# Altium PCB PCB.PcbDoc
Units mm, origin at the board's own origin, x right, y up, seen from the top; angles counter-clockwise.
Board outline 83.2 x 113.2 mm, 2 copper layers (Top Layer, Bottom Layer); 60 components, 35 nets, 209 pads, 0 vias.
Unrouted connection lines stored in the file: 143.
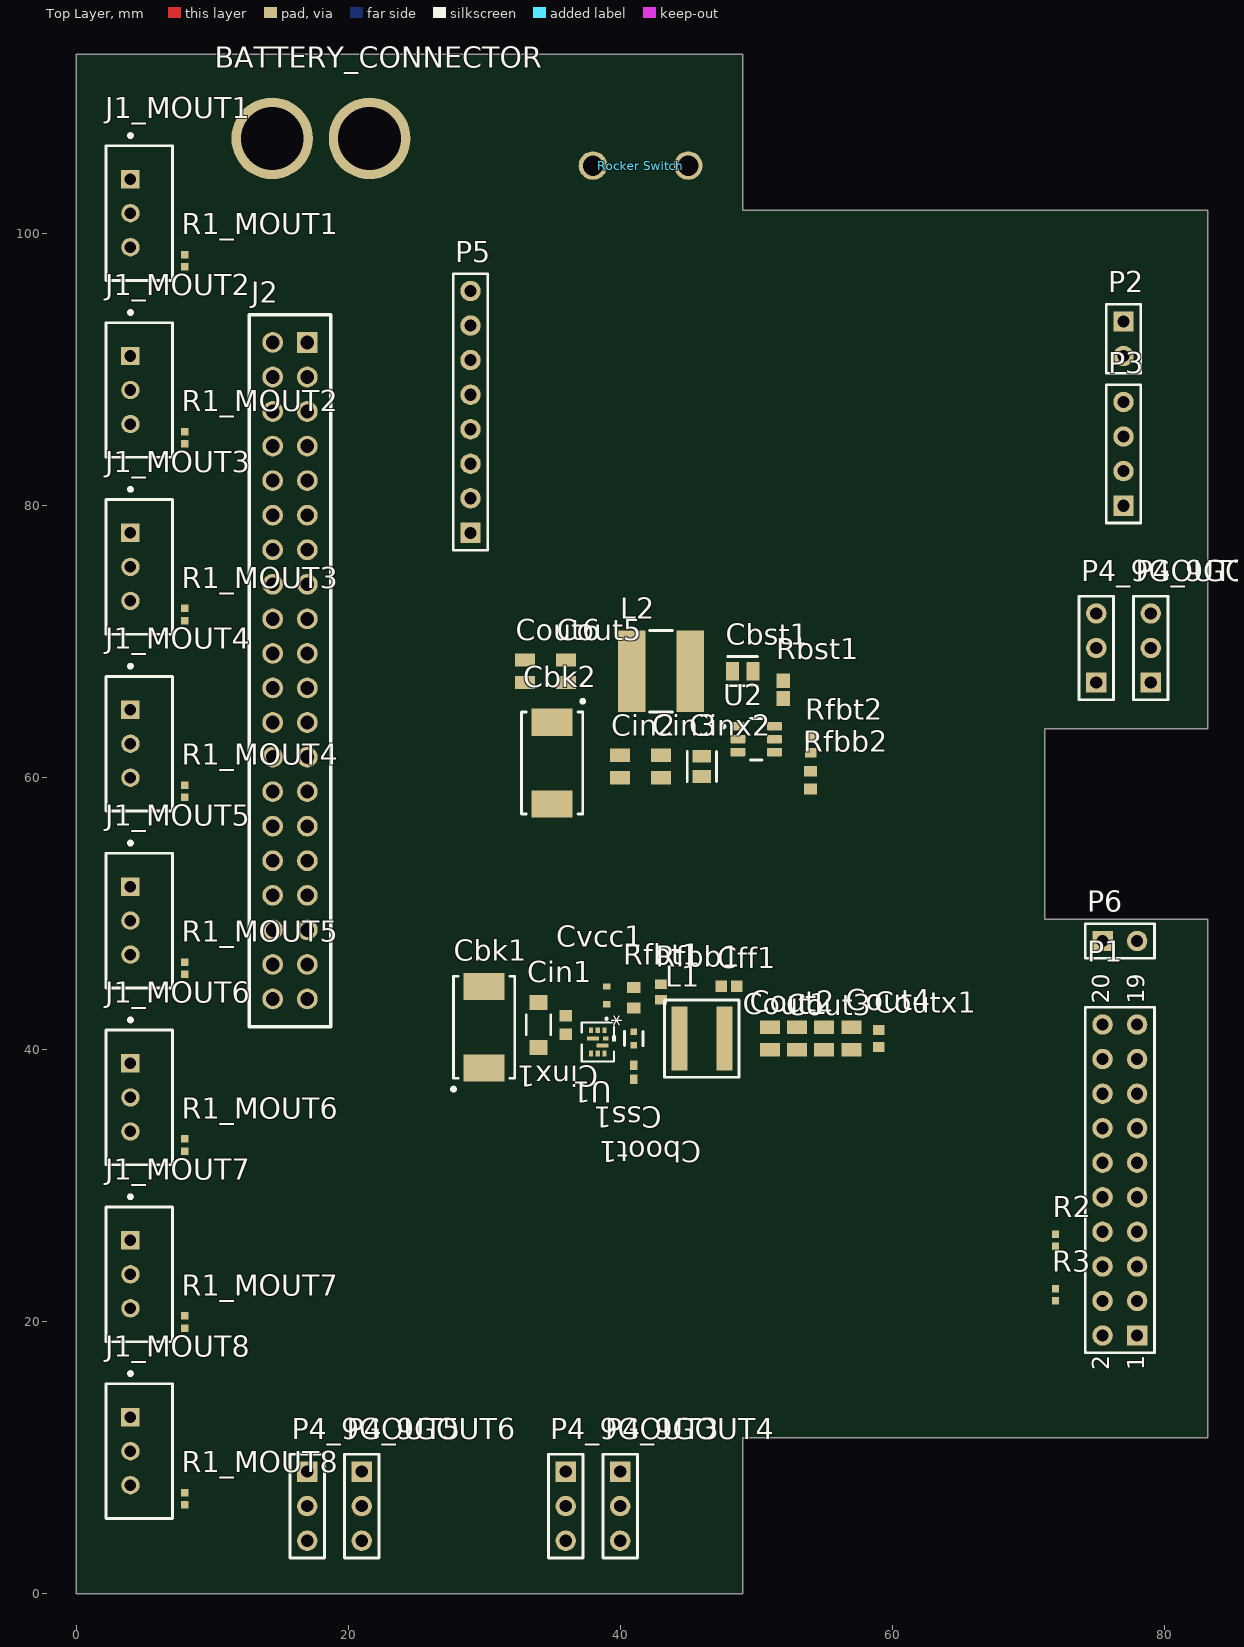
[diagram p0: Top Layer view]
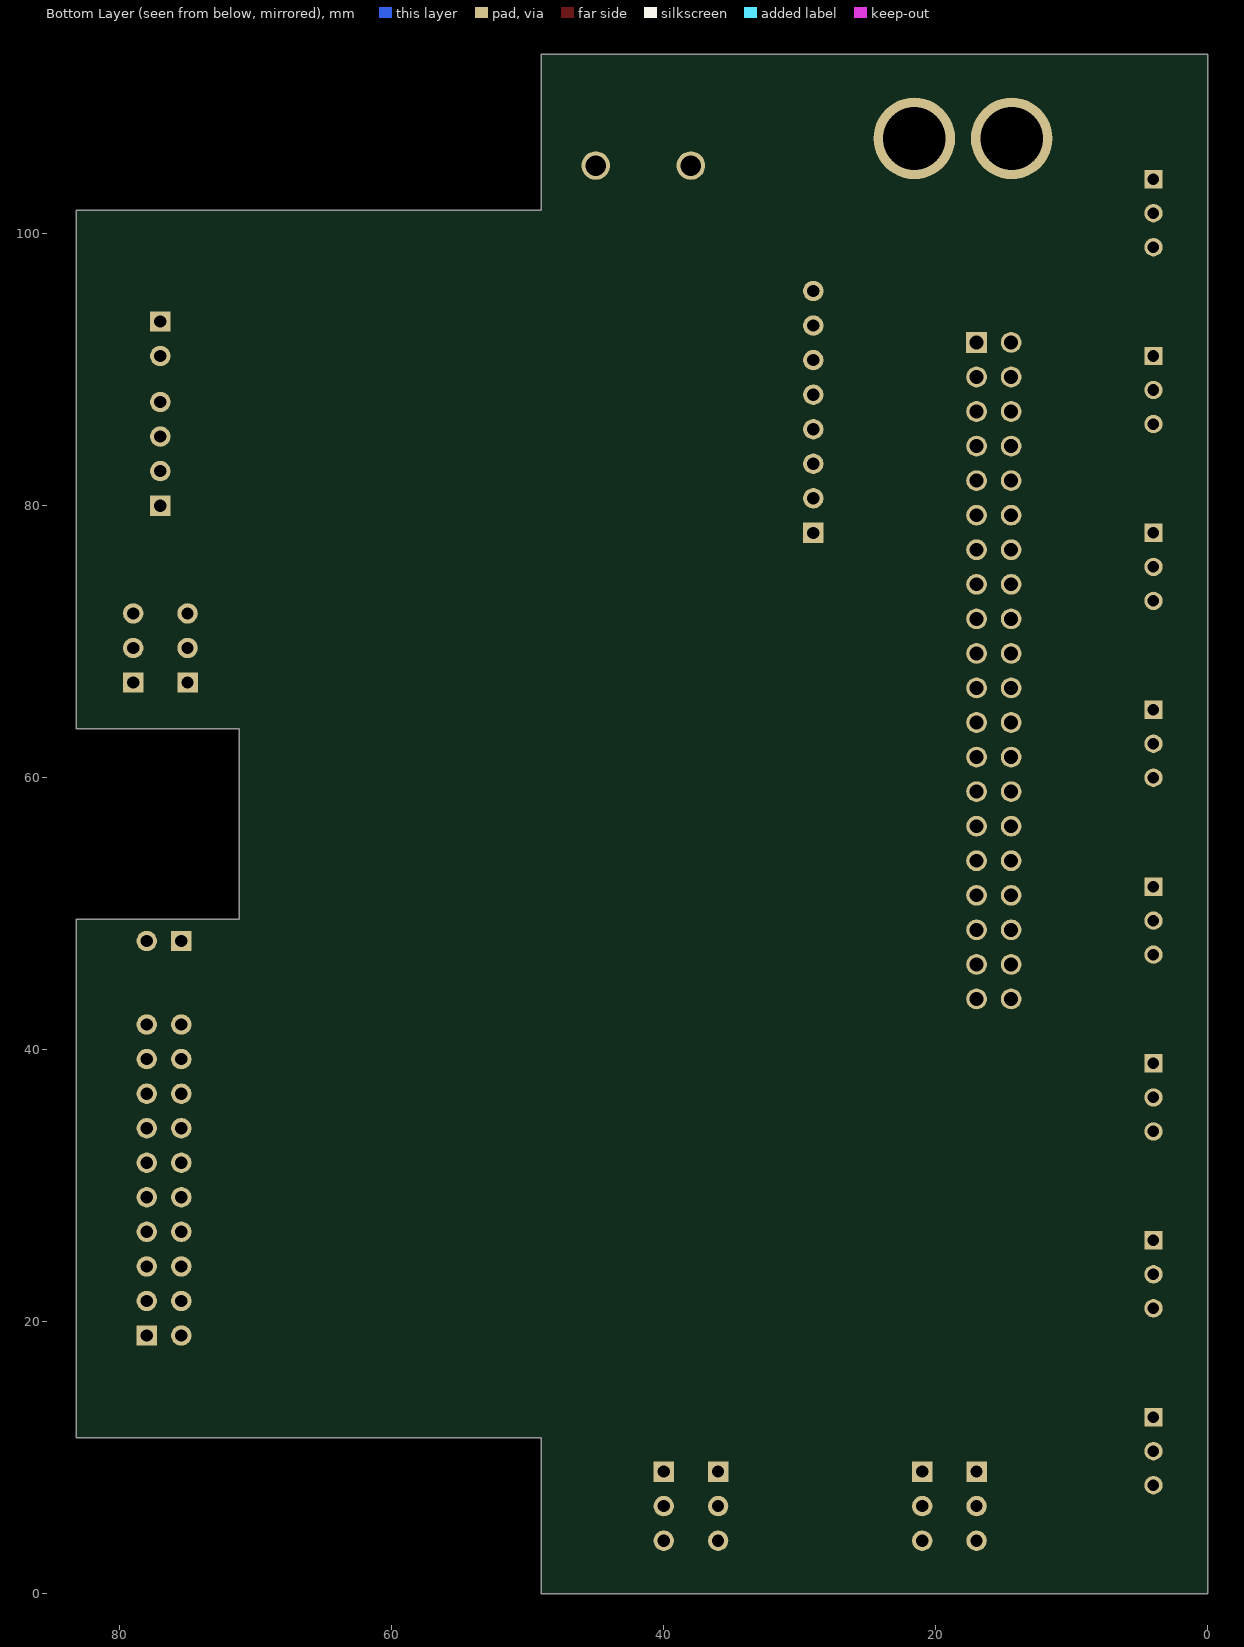
[diagram p1: Bottom Layer view, seen from below]

## Layer stack, top to bottom
Top Solder: solder mask 0.0102, Solder Resist, Dk 3.5
Top Layer: signal copper 0.0356
Dielectric 1: dielectric 0.32, FR-4, Dk 4.8
Bottom Layer: signal copper 0.0356
Bottom Solder: solder mask 0.0102, Solder Resist, Dk 3.5

## Board outline
49,113.2 49,101.7 83.2,101.7 83.2,63.6 71.2,63.6 71.2,49.6 83.2,49.6 83.2,11.5 49,11.5 49,0 0,0 0,113.2

## Design rules (kind name [scope] priority, off if disabled: settings)
Clearance [All] p1: gap=0.254 ignorepadtopadclearanceinfootprint=FALSE except(0: Arc-Hole Track-Hole SMDPad-Hole THPad-Hole Via-Hole Fill-Hole Poly-Hole Region-Hole Text-Hole)
PolygonConnect [All] p1: connectstyle=Relief reliefconductorwidth=0.254 reliefentries=4 polygonreliefangle="90 Angle" airgapwidth=0.254
RoomDefinition PCB [InComponentClass('PCB')] p1: confinementstyle=ConfineIn formatcopy=TRUE lockcomponents=FALSE outline 0,0 84,0 84,114 0,114
RoomDefinition 9GOUT4 [InComponentClass('9GOUT4')] p2: confinementstyle=ConfineIn formatcopy=TRUE lockcomponents=FALSE outline 42,11 38,11 38,2 42,2
RoomDefinition MOUT8 [InComponentClass('MOUT8')] p3: confinementstyle=ConfineIn formatcopy=TRUE lockcomponents=FALSE outline 1,4 9,4 9,17 1,17
RoomDefinition MOUT7 [InComponentClass('MOUT7')] p4: confinementstyle=ConfineIn formatcopy=TRUE lockcomponents=FALSE outline 1,17 9,17 9,30 1,30
RoomDefinition MOUT5 [InComponentClass('MOUT5')] p5: confinementstyle=ConfineIn formatcopy=TRUE lockcomponents=FALSE outline 1,43 9,43 9,56 1,56
RoomDefinition MOUT6 [InComponentClass('MOUT6')] p6: confinementstyle=ConfineIn formatcopy=TRUE lockcomponents=FALSE outline 1,30 9,30 9,43 1,43
RoomDefinition 9GOUT6 [InComponentClass('9GOUT6')] p7: confinementstyle=ConfineIn formatcopy=TRUE lockcomponents=FALSE outline 23,11 19,11 19,2 23,2
RoomDefinition 9GOUT5 [InComponentClass('9GOUT5')] p8: confinementstyle=ConfineIn formatcopy=TRUE lockcomponents=FALSE outline 19,11 15,11 15,2 19,2
RoomDefinition 9GOUT3 [InComponentClass('9GOUT3')] p9: confinementstyle=ConfineIn formatcopy=TRUE lockcomponents=FALSE outline 38,11 34,11 34,2 38,2
RoomDefinition 9GOUT2 [InComponentClass('9GOUT2')] p10: confinementstyle=ConfineIn formatcopy=TRUE lockcomponents=FALSE outline 77,65 81,65 81,74 77,74
RoomDefinition 9GOUT1 [InComponentClass('9GOUT1')] p11: confinementstyle=ConfineIn formatcopy=TRUE lockcomponents=FALSE outline 73,65 77,65 77,74 73,74
RoomDefinition MOUT3 [InComponentClass('MOUT3')] p12: confinementstyle=ConfineIn formatcopy=TRUE lockcomponents=FALSE outline 1,69 9,69 9,82 1,82
RoomDefinition MOUT2 [InComponentClass('MOUT2')] p13: confinementstyle=ConfineIn formatcopy=TRUE lockcomponents=FALSE outline 1,82 9,82 9,95 1,95
RoomDefinition MOUT1 [InComponentClass('MOUT1')] p14: confinementstyle=ConfineIn formatcopy=TRUE lockcomponents=FALSE outline 1,95 9,95 9,108 1,108
RoomDefinition MOUT4 [InComponentClass('MOUT4')] p15: confinementstyle=ConfineIn formatcopy=TRUE lockcomponents=FALSE outline 1,56 9,56 9,69 1,69
RoomDefinition U_5v [InComponentClass('U_5v')] p16: confinementstyle=ConfineIn formatcopy=TRUE lockcomponents=FALSE outline 27,36.66 61,36.66 61,46.66 27,46.66
RoomDefinition U_Reg3v3 [InComponentClass('U_Reg3v3')] p17: confinementstyle=ConfineIn formatcopy=TRUE lockcomponents=FALSE outline 31,56 56,56 56,73.83 31,73.83
RoutingVias [All] p1: holewidth=0.711 width=1.27 viastyle="Through Hole" minholewidth=0.711 minwidth=1.27 maxholewidth=0.711 maxwidth=1.27
SolderMaskExpansion [All] p1: expansion=0.102 istentingtop=FALSE
Width [All] p1: maxlimit=0.254 minlimit=0.254 preferedwidth=0.254
30 further rules are at their usual default settings.

## Classes and differential pairs
channel class Conn9g: 9GOUT1 9GOUT2 9GOUT3 9GOUT4 9GOUT5 9GOUT6
component class 9GOUT6: P4_9GOUT6
component class 9GOUT5: P4_9GOUT5
component class 9GOUT4: P4_9GOUT4
component class 9GOUT3: P4_9GOUT3
component class 9GOUT2: P4_9GOUT2
component class 9GOUT1: P4_9GOUT1
component class MOUT8: J1_MOUT8 R1_MOUT8
component class MOUT7: J1_MOUT7 R1_MOUT7
component class MOUT6: J1_MOUT6 R1_MOUT6
component class MOUT5: J1_MOUT5 R1_MOUT5
component class MOUT4: J1_MOUT4 R1_MOUT4
component class MOUT3: J1_MOUT3 R1_MOUT3
component class MOUT2: J1_MOUT2 R1_MOUT2
component class MOUT1: J1_MOUT1 R1_MOUT1
channel class ConnMotor: MOUT1 MOUT2 MOUT3 MOUT4 MOUT5 MOUT6
component class U_Reg3v3: Cbk2 Cbst1 Cin2 Cin3 Cinx2 Cout5 Cout6 L2 Rbst1 Rfbb2 Rfbt2 U2
component class U_5v: Cbk1 Cboot1 Cff1 Cin1 Cinx1 Cout1 Cout2 Cout3 Cout4 Coutx1 Css1 Cvcc1 L1 Rfbb1 Rfbt1 U1
component class PCB: BATTERY_CONNECTOR J2 P1 P2 P3 P5 P6 R2 R3 "Rocker Switch"

## Components (designator, comment, footprint, x,y, rotation, side; value= is the part's Value field where it differs from the comment)
BATTERY_CONNECTOR "XT60" BATTERY_CONECTO-PCB 18,107 r180 top
Cbk1 "TPSD476K020R0100" TPSD476K020R0100 30,41.66 r90 top
Cbk2 "TPSD476K020R0100" TPSD476K020R0100 35,61.08 r270 top
Cboot1 "GRM155R71C104KA88D" CAP_GRM_155_MUR 41,38.351 r270 top value=Unknown
Cbst1 "C0805C104M5RACTU" FP-C0805C-DN-MFG 49,67.83 r180 top value="0.10 μF"
Cff1 "CC0603JRNPO9BN330" CAPC1608X90X40LL10T20 48,44.66 r0 top
Cin1 "C3216X5R1E476M160AC" FP-C3216-160-MFG 34,41.83 r90 top value=47uF
Cin2 "GRM21BR61E106MA73L" CAPC2012X145N 40,60.83 r90 top
Cin3 "GRM21BR61E106MA73L" CAPC2012X145N 43,60.83 r90 top
Cinx1 "GRM188R72A104KA35D" CAPC1608X90X35NL10T15 36,41.83 r270 top
Cinx2 "C0805C104M5RACTU" FP-C0805C-DN-MFG 46,60.83 r270 top value="0.10 μF"
Cout1 "GRM21BR61A226ME44L" CAPC2012X145N 51,40.83 r90 top
Cout2 "GRM21BR61A226ME44L" CAPC2012X145N 53,40.83 r90 top
Cout3 "GRM21BR61A226ME44L" CAPC2012X145N 55,40.83 r90 top
Cout4 "GRM21BR61A226ME44L" CAPC2012X145N 57,40.83 r90 top
Cout5 "C2012X7S1A226M125AC" CAPC2012X145N 36,67.83 r90 top
Cout6 "C2012X7S1A226M125AC" CAPC2012X145N 33,67.83 r90 top
Coutx1 "GRM188R71E104KA01D" CAPC1608X90X35LL10T15 59,40.83 r90 top
Css1 "CC0402KRX7R8BB103" FP-CC0402-MFG 41,40.83 r270 top value="10 nF"
Cvcc1 "C1005X6S1C105K050BC" CAP_1005_TDK 39,44 r90 top
J1_MOUT1 "Conn_Molex_22-03-5035_eec" Molex_22-03-5035_0 4.65,101.5 r90 top (schematic designator J1)
J1_MOUT2 "Conn_Molex_22-03-5035_eec" Molex_22-03-5035_0 4.65,88.5 r90 top (schematic designator J1)
J1_MOUT3 "Conn_Molex_22-03-5035_eec" Molex_22-03-5035_0 4.65,75.5 r90 top (schematic designator J1)
J1_MOUT4 "Conn_Molex_22-03-5035_eec" Molex_22-03-5035_0 4.65,62.5 r90 top (schematic designator J1)
J1_MOUT5 "Conn_Molex_22-03-5035_eec" Molex_22-03-5035_0 4.65,49.5 r90 top (schematic designator J1)
J1_MOUT6 "Conn_Molex_22-03-5035_eec" Molex_22-03-5035_0 4.65,36.5 r90 top (schematic designator J1)
J1_MOUT7 "Conn_Molex_22-03-5035_eec" Molex_22-03-5035_0 4.65,23.5 r90 top (schematic designator J1)
J1_MOUT8 "Conn_Molex_22-03-5035_eec" Molex_22-03-5035_0 4.65,10.5 r90 top (schematic designator J1)
J2 "ESQ-120-XX-X-D" ESQ-120-XX-X-D 15.73,67.87 r270 top
L1 "XAL5030-222MEB" FP-XAL5030-222MEB-MFG 46,40.83 r0 top
L2 "SRN6045-4R7Y" SRN6045_1 43,67.83 r180 top
P1 "Header 10X2" HDR2X10 78,19 r90 top
P2 "Header 2" HDR1X2 77,93.54 r270 top
P3 "Header 4" HDR1X4 77,80 r90 top
P4_9GOUT1 "Header 3" HDR1X3 75,67 r90 top (schematic designator P4)
P4_9GOUT2 "Header 3" HDR1X3 79,67 r90 top (schematic designator P4)
P4_9GOUT3 "Header 3" HDR1X3 36,9 r270 top (schematic designator P4)
P4_9GOUT4 "Header 3" HDR1X3 40,9 r270 top (schematic designator P4)
P4_9GOUT5 "Header 3" HDR1X3 17,9 r270 top (schematic designator P4)
P4_9GOUT6 "Header 3" HDR1X3 21,9 r270 top (schematic designator P4)
P5 "Header 8" HDR1X8 29,78 r90 top
P6 "Header 2" HDR1X2 75.46,48 r0 top
R1_MOUT1 "CRCW040210K0FKED" RESC1005X40X25NL05T05 8,98 r270 top (schematic designator R1)
R1_MOUT2 "CRCW040210K0FKED" RESC1005X40X25NL05T05 8,85 r270 top (schematic designator R1)
R1_MOUT3 "CRCW040210K0FKED" RESC1005X40X25NL05T05 8,72 r270 top (schematic designator R1)
R1_MOUT4 "CRCW040210K0FKED" RESC1005X40X25NL05T05 8,59 r270 top (schematic designator R1)
R1_MOUT5 "CRCW040210K0FKED" RESC1005X40X25NL05T05 8,46 r270 top (schematic designator R1)
R1_MOUT6 "CRCW040210K0FKED" RESC1005X40X25NL05T05 8,33 r270 top (schematic designator R1)
R1_MOUT7 "CRCW040210K0FKED" RESC1005X40X25NL05T05 8,20 r270 top (schematic designator R1)
R1_MOUT8 "CRCW040210K0FKED" RESC1005X40X25NL05T05 8,7 r270 top (schematic designator R1)
R2 "CRCW040210K0FKED" RESC1005X40X25NL05T05 72,26 r90 top
R3 "CRCW04022K20FKED" RESC1005X40X25NL05T05 72,22 r90 top
Rbst1 "RC0603FR-0730RL" RESC1608X55N 52,66.48 r90 top
Rfbb1 "CRCW060330K0FKEA" RESC1609X50X30LL10T20 43,44.255 r270 top
Rfbb2 "CRCW060310K0FKEA" RESC1609X50X30NL8T20 54,59.83 r270 top
Rfbt1 "RC0603FR-07220KL" RESC1608X55X25ML10T15 41,43.83 r90 top
Rfbt2 "CRCW060330K9FKEA" RESC1609X50X30LL10T20 54,62.405 r90 top
"Rocker Switch" "R1966ABLKBLKGR" R1966AB-PCB 38.117,115.541 r270 top
U1 "TPS566231RQFR" QFN_231RQFR_TEX 38.356,40.58 r270 top
U2 "TPS56339DDCR" FP-DDC0006A-MFG 50,62.83 r0 top

## Footprints (in the part's own frame and the unit in brackets; to place one, negate y for a bottom-side part, rotate by r counter-clockwise, add the part's x,y. Pads: shape width x height; smd on the part's side, far side on the other; paste and mask are expansions set on the pad)
BATTERY_CONECTO-PCB [mm]
  round 6 hole 4.62: 0(-3.58,0) 1(3.58,0)
  body extent -7.82,-4.19 8.08,3.96, height 16.4
CAP_1005_TDK [mil]
  rect 18x22 smd paste+0 mask+0: 1(-25.5,0) 2(25.5,0)
  silkscreen extent -70,-3 -65,3, body extent -20,-10 20,10, height 10
CAP_GRM_155_MUR [mil]
  rect 28x22 smd paste+0 mask+0: 1(-20.5,0) 2(20.5,0)
  body extent -20,-10 20,10, height 10
CAPC1608X90X35LL10T15 [mm] "Chip Capacitor, 2-Leads, Body 1.60x0.80mm, IPC High Density"
  rect 0.75x0.85 smd: 1(-0.625,0) 2(0.625,0)
  body extent -0.85,-0.45 0.85,0.45, height 0.9
CAPC1608X90X35NL10T15 [mm] "Chip Capacitor, 2-Leads, Body 1.7x0.9mm, IPC Medium Density"
  rect 0.85x0.95 smd: 1(-0.675,0) 2(0.675,0)
  body extent -0.85,-0.45 0.85,0.45, height 0.9
CAPC1608X90X40LL10T20 [mm] "Chip Capacitor, 2-Leads, Body 1.70x0.90mm, IPC High Density"
  rect 0.85x0.85 smd: 1(-0.575,0) 2(0.575,0)
  body extent -0.85,-0.45 0.85,0.45, height 0.9
CAPC2012X145N [mm]
  rect 0.97x1.47 smd: 1(-0.83,0) 2(0.83,0)
  body extent -1,-0.63 1,0.63, height 1.45
ESQ-120-XX-X-D [mil]
  rect 60x60 hole 40: 1(-950,50)
  round 60 hole 40: 2(-950,-50) 3(-850,50) 4(-850,-50) 5(-750,50) 6(-750,-50) 7(-650,50) 8(-650,-50) 9(-550,50) 10(-550,-50) 11(-450,50) 12(-450,-50) 13(-350,50) 14(-350,-50) 15(-250,50) 16(-250,-50) 17(-150,50) 18(-150,-50) 19(-50,50) 20(-50,-50) 21(50,50) 22(50,-50) 23(150,50) 24(150,-50) 25(250,50) 26(250,-50) 27(350,50) 28(350,-50) 29(450,50) 30(450,-50) 31(550,50) 32(550,-50) 33(650,50) 34(650,-50) 35(750,50) 36(750,-50) 37(850,50) 38(850,-50) 39(950,50) 40(950,-50)
  silkscreen extent -1030,-117 1030,117
FP-C0805C-DN-MFG [mm]
  rect 0.95x1.35 smd paste+0 mask+0: 1(-0.75,0) 2(0.75,0)
  silkscreen extent -1.1,-1.07 1.1,1.07, body extent -1.4,-0.85 1.4,0.85, height 0.25
FP-C3216-160-MFG [mm]
  rect 1.1x1.35 smd paste+0 mask+0: 1(-1.65,0) 2(1.65,0)
  silkscreen extent -0.72,-0.9 0.72,0.9, body extent -2.3,-1 2.3,1, height 0.25
FP-CC0402-MFG [mm]
  rect 0.5x0.5 smd paste+0 mask+0: 1(-0.5,0) 2(0.5,0)
  silkscreen extent -0.53,-0.68 0.53,0.67, body extent -0.87,-0.48 0.87,0.48, height 0.25
FP-DDC0006A-MFG [mm]
  rrect17% 1.1x0.6 smd paste+0 mask+0: 1(-1.35,0.95) 2(-1.35,0) 3(-1.35,-0.95) 4(1.35,-0.95) 5(1.35,0) 6(1.35,0.95)
  silkscreen extent -2.57,-1.53 0.42,1.53, body extent -2,-1.63 2,1.63, height 0.25
FP-XAL5030-222MEB-MFG [mm]
  rect 1.18x4.7 smd paste+0 mask+0: 1(-1.655,0) 2(1.655,0)
  silkscreen extent -2.74,-2.84 2.74,2.84, body extent -2.84,-2.94 2.84,2.94, height 0.25
HDR1X2 [mm] "Connector; Header; 2 Position"
  rect 1.5x1.5 hole 0.9: 1(0,0)
  round 1.5 hole 0.9: 2(2.54,0)
  silkscreen extent -1.27,-1.27 3.81,1.27
HDR1X3 [mm] "Connector; Header; 3 Position"
  rect 1.5x1.5 hole 0.9: 1(0,0)
  round 1.5 hole 0.9: 2(2.54,0) 3(5.08,0)
  silkscreen extent -1.27,-1.27 6.35,1.27
HDR1X4 [mm] "Connector; Header; 4 Position"
  rect 1.5x1.5 hole 0.9: 1(0,0)
  round 1.5 hole 0.9: 2(2.54,0) 3(5.08,0) 4(7.62,0)
  silkscreen extent -1.27,-1.27 8.89,1.27
HDR1X8 [mm] "Connector; Header; 8 Position"
  rect 1.5x1.5 hole 0.9: 1(0,0)
  round 1.5 hole 0.9: 2(2.54,0) 3(5.08,0) 4(7.62,0) 5(10.16,0) 6(12.7,0) 7(15.24,0) 8(17.78,0)
  silkscreen extent -1.27,-1.27 19.05,1.27
HDR2X10 [mm] "Connector; Header; 10x2 Position"
  rect 1.5x1.5 hole 0.9: 1(0,0)
  round 1.5 hole 0.9: 2(0,2.54) 3(2.54,0) 4(2.54,2.54) 5(5.08,0) 6(5.08,2.54) 7(7.62,0) 8(7.62,2.54) 9(10.16,0) 10(10.16,2.54) 11(12.7,0) 12(12.7,2.54) 13(15.24,0) 14(15.24,2.54) 15(17.78,0) 16(17.78,2.54) 17(20.32,0) 18(20.32,2.54) 19(22.86,0) 20(22.86,2.54)
  silkscreen extent -1.27,-1.27 24.13,3.81
Molex_22-03-5035_0 [mm]
  rect 1.35x1.35 hole 0.85 paste-1000 mask+0: 1(2.5,0.65)
  round 1.35 hole 0.85 paste-1000 mask+0: 2(0,0.65) 3(-2.5,0.65)
  silkscreen extent -4.95,-2.45 5.82,2.45, body extent -4.95,-2.45 4.95,2.45, height 5.96
QFN_231RQFR_TEX [mil]
  rect 16x12 smd paste-6 mask+0: 1(-33.46,19.68) 2(-33.46,0) 3(-33.46,-19.68) 5(33.46,-19.68) 6(33.46,0) 7(33.46,19.68)
  rect 12x35 smd paste+0 mask+0: 4(-9.84,-14) 8(9.84,14)
  rect 12x16 smd paste-6 mask+0: 9(-9.84,23.62)
  silkscreen extent -57,-47 57,52, body extent -50,-40 50,40, height 10
R1966AB-PCB [mm] "SWITCH ROCKER SPST 15A 125V"
  round 2.1 hole 1.5: 0(10.541,-0.117)
  round 2.1 hole 1.5 paste+0: 1(10.541,6.883)
  body extent -11.38,-10.67 11.12,10.28, height 15.6
RESC1005X40X25NL05T05 [mm] "Chip Resistor, 2-Leads, Body 1.00x0.50mm, IPC Medium Density"
  rect 0.55x0.55 smd: 1(-0.45,0) 2(0.45,0)
  body extent -0.53,-0.27 0.53,0.28, height 0.4
RESC1608X55N [mm]
  rect 1.1x1 smd: 1(-0.65,0) 2(0.65,0)
  body extent -0.8,-0.4 0.8,0.4, height 0.55
RESC1608X55X25ML10T15 [mm] "Chip Resistor, 2-Leads, Body 1.70x0.90mm, IPC Low Density"
  rect 0.8x1 smd: 1(-0.75,0) 2(0.75,0)
  body extent -0.85,-0.45 0.85,0.45, height 0.55
RESC1609X50X30LL10T20 [mm] "Chip Resistor, 2-Leads, Body 1.55x0.85mm, IPC High Density"
  rect 0.7x0.85 smd: 1(-0.575,0) 2(0.575,0)
  body extent -0.82,-0.48 0.82,0.48, height 0.5
RESC1609X50X30NL8T20 [mm] "Chip Resistor, 2-Leads, Body 1.65x0.95mm, IPC Medium Density"
  rect 0.8x0.95 smd: 1(-0.65,0) 2(0.65,0)
  body extent -0.82,-0.48 0.82,0.48, height 0.5
SRN6045_1 [mm]
  rect 2.01x6 smd: 1(-2.15,0) 2(2.15,0)
  silkscreen extent -0.85,-3 0.85,3, body extent -3,0 3,4.5, height 3
TPSD476K020R0100 [mm] "Molded Capacitor, 2-Leads, Body 7.50x4.5mm"
  rect 2x3 smd: 1(-3,0) 2(3,0)
  silkscreen extent -4.67,-2.25 3.75,2.37, body extent -3.97,-2.25 3.97,2.25, height 3.1

## Part data
BATTERY_CONNECTOR: library part BATTERY_CONNECTOR, "XT60 PRT-10474"
Cbk1 Cbk2: "CAP TANT 47UF 20V 10% 2917", Capacitance=47uF, Case Code (Imperial)=2917, Case Code (Metric)=7343, Dielectric Material=Tantalum, ESR (Equivalent Series Resistance)=100mR, Leakage Current=9.4uA, Manufacturer="Kyocera AVX", Max Operating Temperature=125°C, Min Operating Temperature=-55°C, Package Quantity=1, Ripple Current=490uA, Tolerance=10%, Voltage=20V, Case/Package=2917, Category="Tantalum Capacitors", ComponentLink1Description=https://datasheet.ciiva.com/11794/0900766b80962b61-11794592.pdf?src-supplier=RSComponents, ComponentLink1URL=https://datasheet.ciiva.com/11794/0900766b80962b61-11794592.pdf?src-supplier=RSComponents, ComponentLink2Description=https://datasheet.ciiva.com/39121/1154520-39121511.pdf?src-supplier=Jameco, ComponentLink2URL=https://datasheet.ciiva.com/39121/1154520-39121511.pdf?src-supplier=Jameco, ComponentLink3Description=https://datasheet.ciiva.com/26787/tpsd476k020r0100-26787068.pdf?src-supplier=IIIC, ComponentLink3URL=https://datasheet.ciiva.com/26787/tpsd476k020r0100-26787068.pdf?src-supplier=IIIC, ComponentLink4Description=https://datasheet.ciiva.com/7713/1680477-7713477.pdf?src-supplier=Element14, ComponentLink4URL=https://datasheet.ciiva.com/7713/1680477-7713477.pdf?src-supplier=Element14, ComponentLink5Description=https://datasheet.ciiva.com/7713/1680477-7713478.pdf?src-supplier=Element14, ComponentLink5URL=https://datasheet.ciiva.com/7713/1680477-7713478.pdf?src-supplier=Element14, ComponentLink6Description=https://datasheet.ciiva.com/16632/tps-16632569.pdf?src-supplier=Avnet+Europe, ComponentLink6URL=https://datasheet.ciiva.com/16632/tps-16632569.pdf?src-supplier=Avnet+Europe, ComponentLink7Description=https://datasheet.ciiva.com/12910/tps-23028-12910555.pdf?src-supplier=Mouser, ComponentLink7URL=https://datasheet.ciiva.com/12910/tps-23028-12910555.pdf?src-supplier=Mouser, ComponentLink8Description=https://datasheet.ciiva.com/11232/tps-11232172.pdf?src-supplier=Avnet, ComponentLink8URL=https://datasheet.ciiva.com/11232/tps-11232172.pdf?src-supplier=Avnet, ComponentLink9Description=https://datasheet.ciiva.com/265/tps-265005.pdf?src-supplier=Digi-Key, ComponentLink9URL=https://datasheet.ciiva.com/265/tps-265005.pdf?src-supplier=Digi-Key, ComponentLink10Description=https://datasheet.ciiva.com/265/tps-265006.pdf?src-supplier=Digi-Key, ComponentLink10URL=https://datasheet.ciiva.com/265/tps-265006.pdf?src-supplier=Digi-Key, ComponentLink11Description=https://datasheet.ciiva.com/265/tps-265007.pdf?src-supplier=Digi-Key, ComponentLink11URL=https://datasheet.ciiva.com/265/tps-265007.pdf?src-supplier=Digi-Key, Depth=4.3mm, Dissipation Factor=6%, Features="General Purpose", Height=2.9mm, Height - Seated (Max)=0.122inch, Lead Free="Lead Free", Length=7.3mm, Manufacturer Part Number=TPSD476K020R0100, Mount="Surface Mount", Packaging="Tape and Reel", Polarity=Polar, Pricing 1="1=1.88550, 10=1.55250, 25=1.53920, 50=1.52390, 100=1.08810, 1000=1.02300 (USD)", Radiation Hardening=No, REACH SVHC="No SVHC", RoHS=Yes, Stock 1=2, Supplier 1="Arrow Electronics", Termination=SMD/SMT, Voltage Rating=20V, Weight=0.023634oz, Width=4.3mm
Cboot1: library part GRM155R71C104KA8, "CAP CER .1UF 16V X7R 0402", Capacitance=0.1ÂµF, Current_Rating=Unknown, DigiKeyPartNumber=490-3261-1-ND, Manufacturer_Name=Murata, Operating_Temperature="-55Â°C ~ 125Â°C", Package/Case=0402, Package_/_Case="0402 (1005 metric)", Temperature_Coefficient=X7R, Voltage_-_Rated=16V, Copyright="Copyright (C) 2015 Accelerated Designs. All rights reserved", DataSheet=http://search.murata.co.jp/Ceramy/image/img/PDF/ENG/GRM155R71C104KA88.pdf, Features="General Purpose", HEADER_GROUP=Capacitors, HEADER_SECTION=Passives, Lead_Spacing=-, Manufacturer_Part_Number=GRM155R71C104KA88D, Mounting="Surface Mount", Mounting_Type="Surface Mount, MLCC", Packaging="Cut Tape (CT)", Quantity_Available=0, R-S_Number=6242317, RefDes=RefDes, SourceLibrary=Murata_2014-12-31, Thickness=0.50mm, Tolerance=Unknown, Type=DEV, Vendor=Murata, Voltage=Unknown
Cbst1 Cinx2: library part CMP-03020-020207-1, "CAP CER 0.1UF 50V X7R 0805", Capacitance="0.10 μF", Manufacturer=KEMET, Package=C0805C-DN, Temperature="-55°C to +125°C", Temperature Characteristic=X7R, Temperature Coefficient=30ppm/°C, Temperature Range High=+125°C, Temperature Range Low=-55°C, Tolerance=0.2, Voltage Rating="50 V", Automotive=No, Category=Cap, ComponentLink2Description=Datasheet, ComponentLink2URL=https://content.kemet.com/datasheets/KEM_C1003_C0G_SMD.pdf, Device Class L1="Passive Components", Device Class L2=Capacitors, Device Class L3="Ceramic Capacitors", Digikey Description="CAP CER 0.1UF 50V X7R 0805", Height=0.88mm, Ipc Land Pattern Name=CAPC200125X78, Lead Free=Yes, Manufacturer Part Number=C0805C104M5RACTU, Material=Ceramic, Mouser Description="Multilayer Ceramic Capacitors MLCC - SMD/SMT 50volts 0.1uF X7R 20%", Octopart=https://octopart.com/c0805c104m5ractu-kemet-129379, RoHS=TRUE
Cff1: library part CMP-2000-06072-1, "Chip Capacitor, 33 pF, +/- 5%, 50 V, -55 to 125 degC, 0603 (1608 Metric), RoHS, Tape and Reel", Capacitance=33pF, Manufacturer=Yageo, Operating Temperature=-55°C~125°C, Package / Case=0603(1608Metric), Package Description="2-Pin Surface Mount Device, Body 1.6 x 0.8 mm", Package Reference=0603, Ratings=-, Standard Package=4,000, Temperature Coefficient=C0G,NP0, Tolerance=±5%, Voltage - Rated=50V, Applications=GeneralPurpose, Category=Capacitors, Datasheet URL=http://www.yageo.com/NewPortal/yageodocoutput?fileName=/pdf/MLCC/UPY-GP_NP0_16V-to-50V_14.pdf, Datasheet Version="Rev. 14, 07/2016", Family=CeramicCapacitors, Featured Product=CommodityMultilayerCeramicCapacitors–CCSeries, Features=-, Height - Seated (Max)=-, Lead Spacing=-, Lead Style=-, Manufacturer URL=http://www.yageo.com/, Mounting Technology=SurfaceMount, Mounting Type=SurfaceMount,MLCC, Online Catalog=CCSeries, Other Names=0603CG330J9B200223886715339223886715339311-1064-2311-1282-2311-1282-2-NDCC0603JRNP09BN330BCC0603JRNPO9BN330B, Packaging=Tape&Reel(TR), Product Training Modules=MultilayerCeramicCapacitors, Series=CC, Size / Dimension="0.063\"Lx0.031\"W(1.60mmx0.80mm)", Thickness (Max)="0.035\"(0.90mm)"
Cin1: library part CMP-08246-000014-1, "CAP CER 47UF 25V X5R 1206", 3DS Part Number=220-00004, Capacitance=47uF, Manufacturer=TDK, Package=C3216-160, Temperature="-55°C to +85°C", Temperature Characteristic=X5R, Temperature Coefficient=15%, Temperature Range High=+85°C, Temperature Range Low=-55°C, Tolerance=20%, Voltage=25V, Automotive=No, Category=Cap, ComponentLink2Description=Datasheet, ComponentLink2URL=https://product.tdk.com/info/en/catalog/datasheets/mlcc_commercial_general_en.pdf, Device Class L1="Passive Components", Device Class L2=Capacitors, Device Class L3="Ceramic Capacitors", Digikey Description="CAP CER 47UF 25V X5R 1206", Footprint Url=https://product.tdk.com/info/en/catalog/spec/mlccspec_commercial_general_midvoltage_en.pdf, Height=1.8mm, Ipc Land Pattern Name=CAPC320160X160, Lead Free=Yes, Manufacturer Part Number=C3216X5R1E476M160AC, Material=Ceramic, Mouser Description="Multilayer Ceramic Capacitors MLCC - SMD/SMT 1206 47uF 25volts X5R 20%", Octopart=https://octopart.com/c3216x5r1e476m160ac-tdk-25947783, RoHS=TRUE, Voltage Rating=25V
Cin2 Cin3: "Capacitor", Manufacturer_Name="Murata Electronics", Mouser2 Part Number=81-GRM21BR61E106MA3L, Datasheet Link=https://componentsearchengine.com//GRM21BR61E106MA73L.pdf, Height=1.45mm, Manufacturer_Part_Number=GRM21BR61E106MA73L, Mouser2 Price/Stock=https://www.mouser.com/Search/Refine.aspx?Keyword=81-GRM21BR61E106MA3L
Cinx1: library part CMP-1662-00005-4, "Chip Capacitor, 0.1 uF, +/- 10%, 100 V, 0603 (1608 Metric), RoHS, Tape and Reel", Manufacturer=Murata, Max Operating Temperature="125 degC", Min Operating Temperature="-55 degC", Package Quantity=4000, Voltage Rating="100 V", ComponentLink1Description="Manufacturer URL", ComponentLink1URL=http://www.murata.com/, ComponentLink2Description=Datasheet, ComponentLink2URL=http://search.murata.co.jp/Ceramy/image/img/A01X/G101/ENG/GRM188R72A104KA35-01.pdf, DatasheetVersion=02/2016, Height="0.8 mm", Length="1.6 mm", Mount="Surface Mount", Mounting Technology="Surface Mount", PackageDescription="2-Pin Surface Mount Device, Body 1.6 x 0.8 mm", PackageReference=0603, Packaging="Tape and Reel", REACH SVHC="No SVHC", RoHSCompliant=true
Cout1 Cout2 Cout3 Cout4: "Capacitor", Manufacturer_Name="Murata Electronics", Mouser Part Number=81-GRM21BR61A226ME4L, Arrow Part Number=GRM21BR61A226ME44L, Arrow Price/Stock=https://www.arrow.com/en/products/grm21br61a226me44l/murata-manufacturing, Datasheet Link=http://www.murata.com/~/media/webrenewal/support/library/catalog/products/capacitor/mlcc/c02e.pdf, Height=1.45mm, Manufacturer_Part_Number=GRM21BR61A226ME44L, Mouser Price/Stock=https://www.mouser.co.uk/ProductDetail/Murata-Electronics/GRM21BR61A226ME44L?qs=eeBpzGFlv%252B8tSfxib2AMhw%3D%3D
Cout5 Cout6: "Capacitor", Manufacturer_Name=TDK, Mouser2 Part Number=810-C2012X7S1A226MAC, Datasheet Link=https://componentsearchengine.com//C2012X7S1A226M125AC.pdf, Height=1.45mm, Manufacturer_Part_Number=C2012X7S1A226M125AC, Mouser2 Price/Stock=https://www.mouser.com/Search/Refine.aspx?Keyword=810-C2012X7S1A226MAC
Coutx1: library part CMP-2006-02868-1, Manufacturer=Murata, Part Number=GRM188R71E104KA01D
Css1: library part CMP-03422-000595-1, "CAP CER 10000PF 25V X7R 0402", Capacitance="10 nF", Manufacturer=YAGEO, Package=CC0402, Temperature="-55°C to +125°C", Temperature Characteristic=X7R, Temperature Coefficient=30ppm/°C, Temperature Range High=+125°C, Temperature Range Low=-55°C, Tolerance=0.1, Voltage Rating="25 V", Automotive=No, Automotive Grade=NA, Category=Cap, ComponentLink2Description=Datasheet, ComponentLink2URL=http://www.yageo.com/documents/recent/UPY-GP_NP0_16V-to-50V_16.pdf, Device Class L1="Passive Components", Device Class L2=Capacitors, Device Class L3="Ceramic Capacitors", Digikey Description="CAP CER 10000PF 25V X7R 0402", Footprint Url=http://www.yageo.com/exep/pages/download/literatures/UPY-C_GEN_24.pdf, Height=0.55mm, Ipc Land Pattern Name=CAPC10050X50, Lead Free=Yes, Manufacturer Part Number=CC0402KRX7R8BB103, Material=Ceramic, Mouser Description="Multilayer Ceramic Capacitors MLCC - SMD/SMT 10nF 25V X7R 10%", Octopart=https://octopart.com/cc0402krx7r8bb103-yageo-8376512, RoHS=TRUE
Cvcc1: library part C1005X6S1C105K05, "No Description Available", Built_By=EMA_UL_Team, Copyright="Copyright (C) 2018 Accelerated Designs. All rights reserved", Manufacturer_Part_Number=C1005X6S1C105K050BC, RefDes=RefDes, SourceLibrary=TDK_2015_05_22, Type=DEV, Vendor=TDK
J1_MOUT1 J1_MOUT2 J1_MOUT3 J1_MOUT4 J1_MOUT5 J1_MOUT6 J1_MOUT7 J1_MOUT8: "CONN 3 Positions Header Connector 0.098\" (2.50mm) Through Hole Tin", contact_resistance=20mΩ, Current_Rating=3A, Digikey Part Number=WM18887-ND, flammability_rating="UL 94 V-0", insulation_resistance=1GΩ, Manufacturer=Molex, Mouser Part Number=538-22-03-5035, Octopart Part Number=2021e92f3fb6ffe6, Package=CONN_PTH_HDR3, Part Number=22-03-5035, Temperature="-40°C to +105°C", Temperature Range High=+105°C, Temperature Range Low=-40°C, voltage_rating_ac=250V, Category 75Fab8F04590Ae3D="Connectors and Adapters", Category 0836C53C3D42D3F1=Connectors, Category E7012A0Bd22E3Cc6="Headers & Receptacles", ComponentLink1Description=Upverter, ComponentLink1URL=https://upverter.com/upn/revision/5f4eec58f2a5589a/, ComponentLink2Description=Datasheet, ComponentLink2URL=http://www.molex.com/pdm_docs/sd/022035035_sd.pdf, contact_material=Brass, contact_plating=Tin, Digikey Description="CONN 3 Positions Header Connector 0.098\" (2.50mm) Through Hole Tin", gender=Female, glow_wire_compliant=Non-Compliant, halogen_free_status="Not Low Halogen", helpURL=https://upverter.com/upn/revision/5f4eec58f2a5589a/, Lead Free=yes, lifecycle_status=Active, Mounting Type=pcb, Num Pins=3, number_of_circuits=3, number_of_contacts=3, number_of_positions=3, number_of_rows=1, orientation=Vertical, pin_pitch=2.5mm, Price=0.362417304973, RoHS=TRUE, shrouded=Yes, size_height=5.9mm, size_length=9.9mm, size_width=4.9mm, Supplier 1=Digi-Key, Supplier 2=Mouser, Supplier Part Number 1=WM18887-ND, Supplier Part Number 2=538-22-03-5035, voltage_rating_dc=250V
J2: "ESQ Series .100 PC/104â„¢ Elevated Socket Strip", Package=None, Digi-Key_Part_Number=ESQ-120-38-S-D-ND, Digi-Key_Purchase_URL=https://www.digikey.com/product-detail/en/samtec-inc/ESQ-120-38-S-D/ESQ-120-38-S-D-ND/7098755?utm_source=snapeda&utm_medium=aggregator&utm_campaign=symbol, MF=Samtec, MP=ESQ-120-38-S-D, SnapEDA_Link=https://www.snapeda.com/parts/ESQ-120-38-S-D/Samtec%20Inc/view-part/786160/?ref=snap
L1: library part CMP-11268-000050-1, "Fixed Inductors 2.2uH 20% 9.7A 14.5mOhms", DC Resistance (DCR)=14.5mR, Inductance=2.2uH, Max DC Current=9.2A, Max Operating Temperature=125°C, Min Operating Temperature=-40°C, Package Quantity=20, Self Resonant Frequency=38MHz, Test Frequency=100kHz, Tolerance=20%, Core Material=Composite, Height=3.1mm, Lead Free="Contains Lead", Length=5.68mm, Packaging="Tape and Reel", Shielding=Shielded, Termination=SMD/SMT, Width=5.48mm
L2: "Inductor", Manufacturer_Name=Bourns, Datasheet Link=https://www.bourns.com/data/global/pdfs/SRN6045.pdf, Manufacturer_Part_Number=SRN6045-4R7Y
P1: "Header, 10-Pin, Dual row", LatestRevisionDate=17-Jul-2002, LatestRevisionNote="Re-released for DXP Platform.", Publisher="Altium Limited"
P2 P6: "Header, 2-Pin", LatestRevisionDate=17-Jul-2002, LatestRevisionNote="Re-released for DXP Platform.", Publisher="Altium Limited"
P3: "Header, 4-Pin", LatestRevisionDate=17-Jul-2002, LatestRevisionNote="Re-released for DXP Platform.", Publisher="Altium Limited"
P4_9GOUT1 P4_9GOUT2 P4_9GOUT3 P4_9GOUT4 P4_9GOUT5 P4_9GOUT6: "Header, 3-Pin", LatestRevisionDate=17-Jul-2002, LatestRevisionNote="Re-released for DXP Platform.", Publisher="Altium Limited"
P5: "Header, 8-Pin", LatestRevisionDate=17-Jul-2002, LatestRevisionNote="Re-released for DXP Platform.", Publisher="Altium Limited"
R1_MOUT1 R1_MOUT2 R1_MOUT3 R1_MOUT4 R1_MOUT5 R1_MOUT6 R1_MOUT7 R1_MOUT8 R2: library part CMP-2002-08135-1, Manufacturer="Vishay Dale", Part Number=CRCW040210K0FKED
R3: library part CMP-2002-08452-1, Manufacturer="Vishay Dale", Part Number=CRCW04022K20FKED
Rbst1: "Resistor", Manufacturer_Name="YAGEO (PHYCOMP)", Datasheet Link=http://www.yageo.com/documents/recent/PYu-RC0603_51_RoHS_L_v5.pdf, Height=0.55mm, Manufacturer_Part_Number=RC0603FR-0730RL
Rfbb1: library part CMP-2000-03223-1, Manufacturer="Vishay Dale", Part Number=CRCW060330K0FKEA
Rfbb2: library part CMP-1666-00005-4, "Chip Resistor, 10 KOhm, +/- 1%, 100 mW, -55 to 155 degC, 0603 (1608 Metric), RoHS, Tape and Reel", Manufacturer="Vishay Semiconductor", Max Operating Temperature="155 degC", Min Operating Temperature="-55 degC", Package Quantity=5000, Voltage Rating="75 V", ComponentLink1Description="Manufacturer URL", ComponentLink1URL=http://www.vishay.com/, ComponentLink2Description=Datasheet, ComponentLink2URL=https://datasheet.ciiva.com/11809/0900766b80d98afc-11809037.pdf, DatasheetVersion=06/2012, Height="0.45 mm", Length="1.55 mm", Mounting Technology="Surface Mount", PackageDescription="2-Pin Surface Mount Device, Body 1.575 x 0.85 mm", PackageReference=0603, Packaging="Tape and Reel", REACH SVHC=Unknown, RoHSCompliant=true
Rfbt1: library part CMP-1659-00037-1, "Chip Resistor, 220 KOhm, +/- 1%, 100 mW, -55 to 155 degC, 0603 (1608 Metric), RoHS, Tape and Reel", Max Operating Temperature="70 degC", Min Operating Temperature="-25 degC", Resistance="0.1 Ohm", ComponentLink1Description="Manufacturer URL", ComponentLink1URL=http://www.yageo.com/, ComponentLink2Description=Datasheet, ComponentLink2URL=http://www.yageo.com/documents/recent/PYu-RC_Group_51_RoHS_L_04.pdf, DatasheetVersion="Rev. 4, 02/2016", Height="0.25 inch", Length="0.75 inch", PackageDescription="2-Pin Surface Mount Device, Body 1.6 x 0.8 mm", PackageReference=0603, REACH SVHC="No SVHC", RoHSCompliant=true, Width="0.25 inch"
Rfbt2: library part CMP-2000-03227-1, Manufacturer="Vishay Dale", Part Number=CRCW060330K9FKEA
"Rocker Switch": library part "Rocker Switch", "SWITCH ROCKER SPST 15A 125V"
U1: "No Description Available", Built_By=EMA_Matt, Copyright="Copyright (C) 2018 Accelerated Designs. All rights reserved", DataSheet=https://www.ti.com.cn/cn/lit/ds/symlink/tps566238.pdf?ts=1594414902944&ref_url=https%253A%252F%252Fwww.google.com%252F, Manufacturer_Part_Number=TPS566231RQFR, RefDes=RefDes, SourceLibrary=TI_2020-07-16, Type=DEV, Vendor="Texas Instruments"
U2: library part CMP-04918-000012-1, "PWR MGMT SPECIALIZED REGULATOR", Manufacturer="Texas Instruments", Max Junction Temp=+125°C, Max Supply Voltage=24V, Min Supply Voltage=4.5V, Nominal Supply Current=98uA, Output Current=3A, Output Voltage=0.8-16V, Package=DDC0006A, Switching Frequency=500kHz, Temperature="-40°C to +125°C", Temperature Range Low=-40°C, Automotive=No, Category=IC, ComponentLink2Description=Datasheet, ComponentLink2URL=http://www.ti.com/lit/ds/symlink/tps56339.pdf, Device Class L1="Integrated Circuits (ICs)", Device Class L2="Power Management ICs", Device Class L3="Voltage Regulators - Switching", Digikey Description="PWR MGMT SPECIALIZED REGULATOR", Height=1.1mm, Lead Free=Yes, Manufacturer Part Number=TPS56339DDCR, Max Duty Cycle=97%, Mouser Description="4.5-V to 24-V input, 3-A output synchronous buck converter 6-SOT-23-THIN -40 to 125", Number Of Outputs=1, Octopart=https://octopart.com/tps56339ddcr-texas+instruments-101466410, Output Type=AdjustableProgrammable, RoHS=TRUE, Standoff Height=0mm, Switching Topology=Buck, Temperature Range High=+125°C

## Nets (pads, with @x,y where several pads share a name; then routed paths per layer and width w, separated by ;. In a path a pad name is that pad's centre, name@x,y a point inside that pad or via, vN(x,y) a via of type N, cw(c..) or ccw(c..) an arc to the next point about the centre after c; other vN are vias at no path point)
3V3: Cout5.2 Cout6.2 L2.2 R1_MOUT1.2 R1_MOUT2.2 R1_MOUT3.2 R1_MOUT4.2 R1_MOUT5.2 R1_MOUT6.2 R1_MOUT7.2 R1_MOUT8.2 Rfbt2.2
5V: Cff1.2 Cout1.2 Cout2.2 Cout3.2 Cout4.2 Coutx1.2 J2.2 J2.4 L1.2 P3.3 P4_9GOUT1.2 P4_9GOUT2.2 P4_9GOUT3.2 P4_9GOUT4.2 P4_9GOUT5.2 P4_9GOUT6.2 P5.1 P6.1 Rfbt1.2
DATA1: J1_MOUT1.3 P1.13 R1_MOUT1.1
DATA2: J1_MOUT2.3 P1.11 R1_MOUT2.1
DATA3: J1_MOUT3.3 P1.9 R1_MOUT3.1
DATA4: J1_MOUT4.3 P1.7 R1_MOUT4.1
DATA5: J1_MOUT5.3 P1.14 R1_MOUT5.1
DATA6: J1_MOUT6.3 P1.12 R1_MOUT6.1
DATA7: J1_MOUT7.3 P1.10 R1_MOUT7.1
DATA8: J1_MOUT8.3 P1.8 R1_MOUT8.1
GND: BATTERY_CONNECTOR.1 Cbk1.2 Cbk2.2 Cin1.2 Cin2.1 Cin3.1 Cinx1.1 Cinx2.2 Cout1.1 Cout2.1 Cout3.1 Cout4.1 Cout5.1 Cout6.1 Coutx1.1 Css1.2 Cvcc1.2 J1_MOUT1.1 J1_MOUT2.1 J1_MOUT3.1 J1_MOUT4.1 J1_MOUT5.1 J1_MOUT6.1 J1_MOUT7.1 J1_MOUT8.1 J2.6 J2.9 J2.14 J2.20 J2.25 J2.30 J2.34 J2.39 P1.1 P1.2 P2.2 P3.4 P4_9GOUT1.3 P4_9GOUT2.3 P4_9GOUT3.3 P4_9GOUT4.3 P4_9GOUT5.3 P4_9GOUT6.3 P5.3 P6.2 R3.1 Rfbb1.1 Rfbb2.2 U1.4 U2.1
NetBATTERY_CONNECTOR_0: "Rocker Switch.0" BATTERY_CONNECTOR.0
NetCboot1_1: Cboot1.1 L1.1 U1.8
NetCboot1_2: Cboot1.2 U1.7
NetCbst1_1: Cbst1.1 Rbst1.2
NetCbst1_2: Cbst1.2 L2.1 U2.2
NetCff1_1: Cff1.1 Rfbb1.2 Rfbt1.1 U1.2
NetCss1_1: Css1.1 U1.9
NetCvcc1_1: Cvcc1.1 U1.1
NetJ2_3: J2.3 P5.5
NetJ2_5: J2.5 P5.4
NetJ2_8: J2.8 P3.2
NetJ2_10: J2.10 P3.1
NetP1_6: P1.6 R2.1 R3.2
NetRbst1_1: Rbst1.1 U2.6
NetRfbb2_1: Rfbb2.1 Rfbt2.1 U2.4
RxD: J2.32 P1.3
SERVO1: P1.19 P4_9GOUT1.1
SERVO2: P1.17 P4_9GOUT2.1
SERVO3: P1.15 P4_9GOUT3.1
SERVO4: P1.20 P4_9GOUT4.1
SERVO5: P1.18 P4_9GOUT5.1
SERVO6: P1.16 P4_9GOUT6.1
TxD: J2.33 P1.5
VBAT: "Rocker Switch.1" Cbk1.1 Cbk2.1 Cin1.1 Cin2.2 Cin3.2 Cinx1.2 Cinx2.1 J1_MOUT1.2 J1_MOUT2.2 J1_MOUT3.2 J1_MOUT4.2 J1_MOUT5.2 J1_MOUT6.2 J1_MOUT7.2 J1_MOUT8.2 P2.1 R2.2 U1.5 U1.6 U2.3
pads on no net: J2.1 J2.7 J2.11 J2.12 J2.13 J2.15 J2.16 J2.17 J2.18 J2.19 J2.21 J2.22 J2.23 J2.24 J2.26 J2.27 J2.28 J2.29 J2.31 J2.35 J2.36 J2.37 J2.38 J2.40 P1.4 P5.2 P5.6 P5.7 P5.8 U1.3 U2.5

## Text inside footprints (layer, text, board x,y; h text height)
P1: Top Overlay "20" at 75.968,43.384 h1.27 r90; Top Overlay "19" at 78.508,43.384 h1.27 r90; Top Overlay "1" at 78.508,16.46 h1.27 r90; Top Overlay "2" at 75.968,16.46 h1.27 r90
U1: Top Overlay "*" at 38.852,42.586 h1.27 r270; Mechanical 13 "*" at 38.471,41.29 h1.27 r270